# Altium PCB PCB.PcbDoc
Units mm, origin at the board's own origin, x right, y up, seen from the top; angles counter-clockwise.
Board outline 122.4 x 101.6 mm, 4 copper layers (Top Layer, Int1 (GND), Int 2 (PWR), Bottom Layer), stack 1.626 mm thick; 77 components, 58 nets, 254 pads, 31 vias.
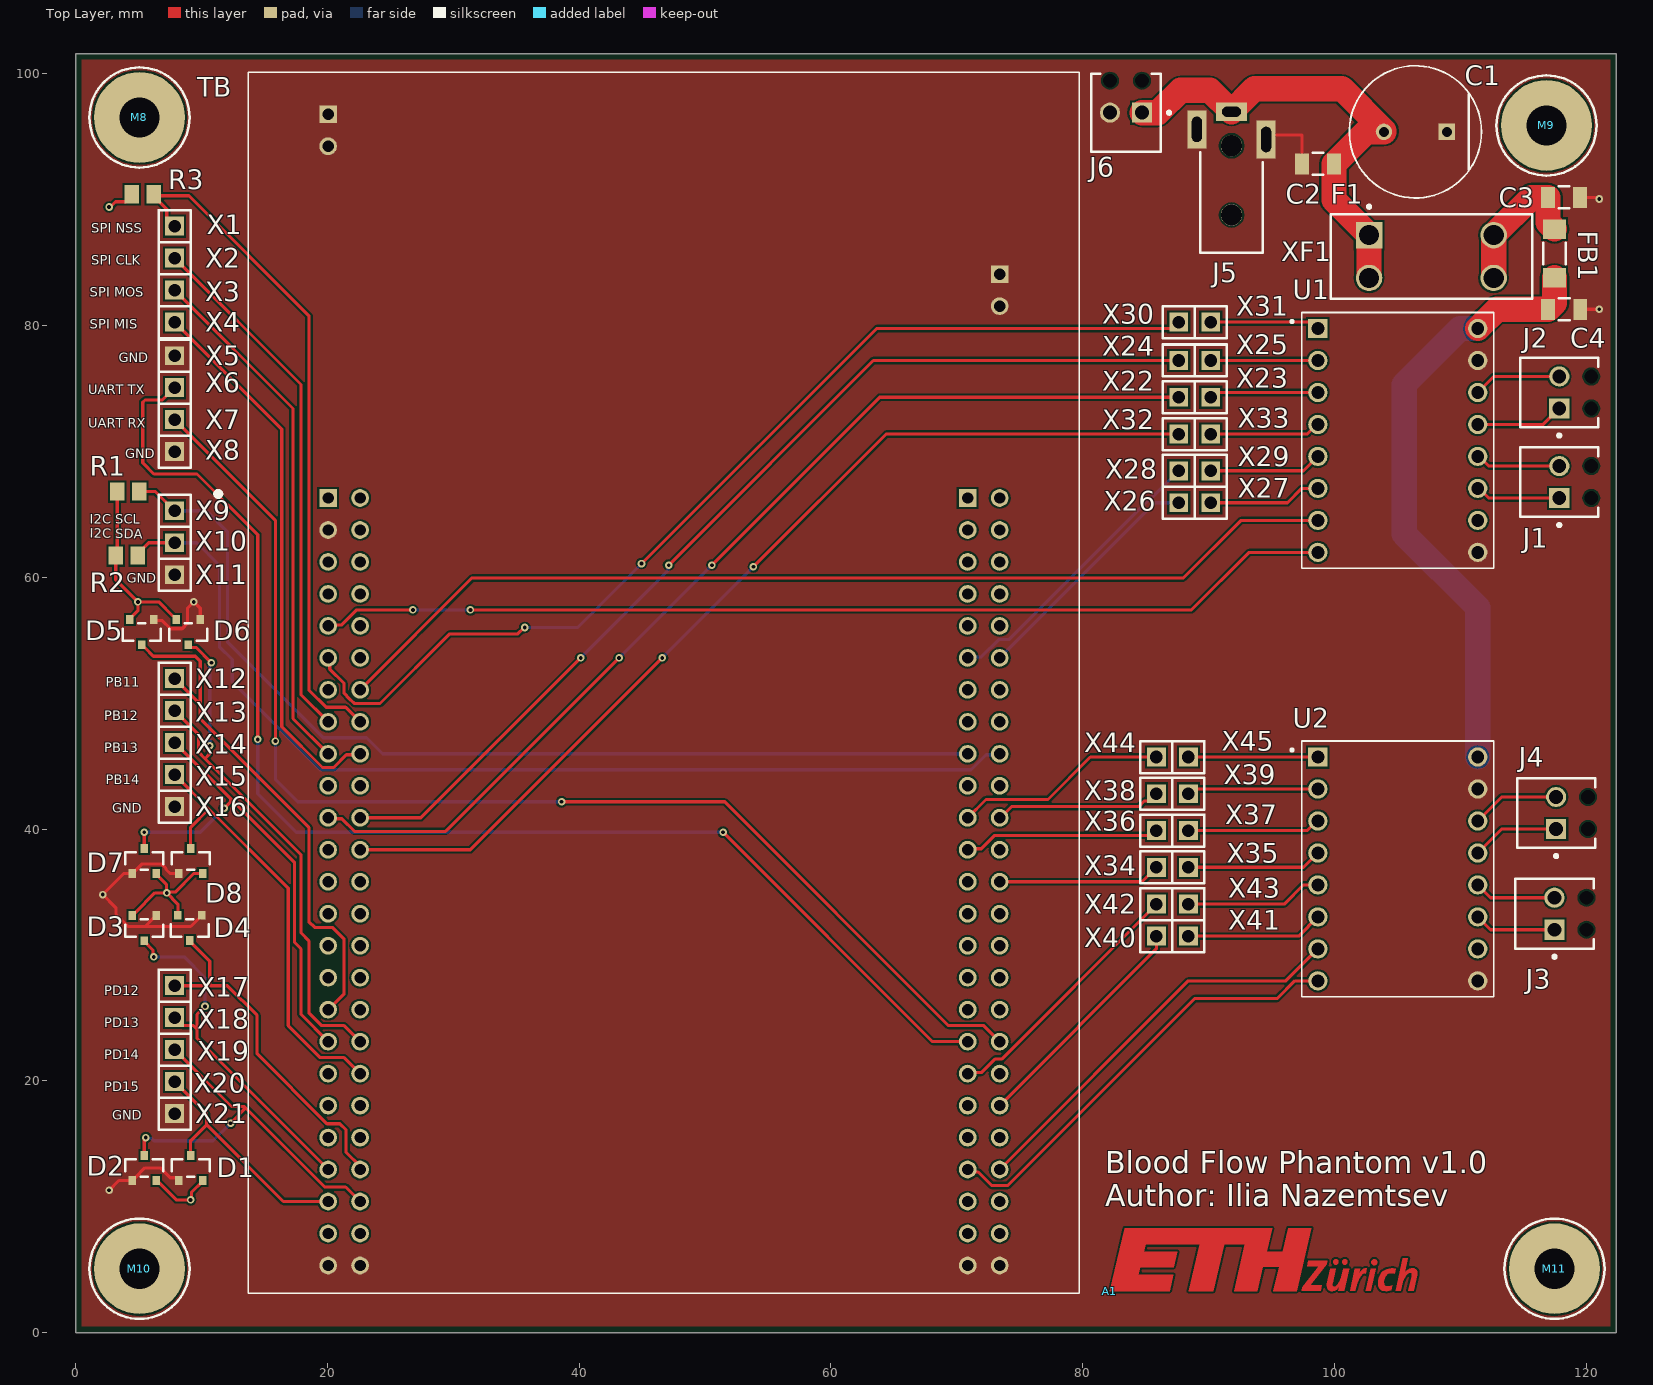
[diagram p0: Top Layer view]
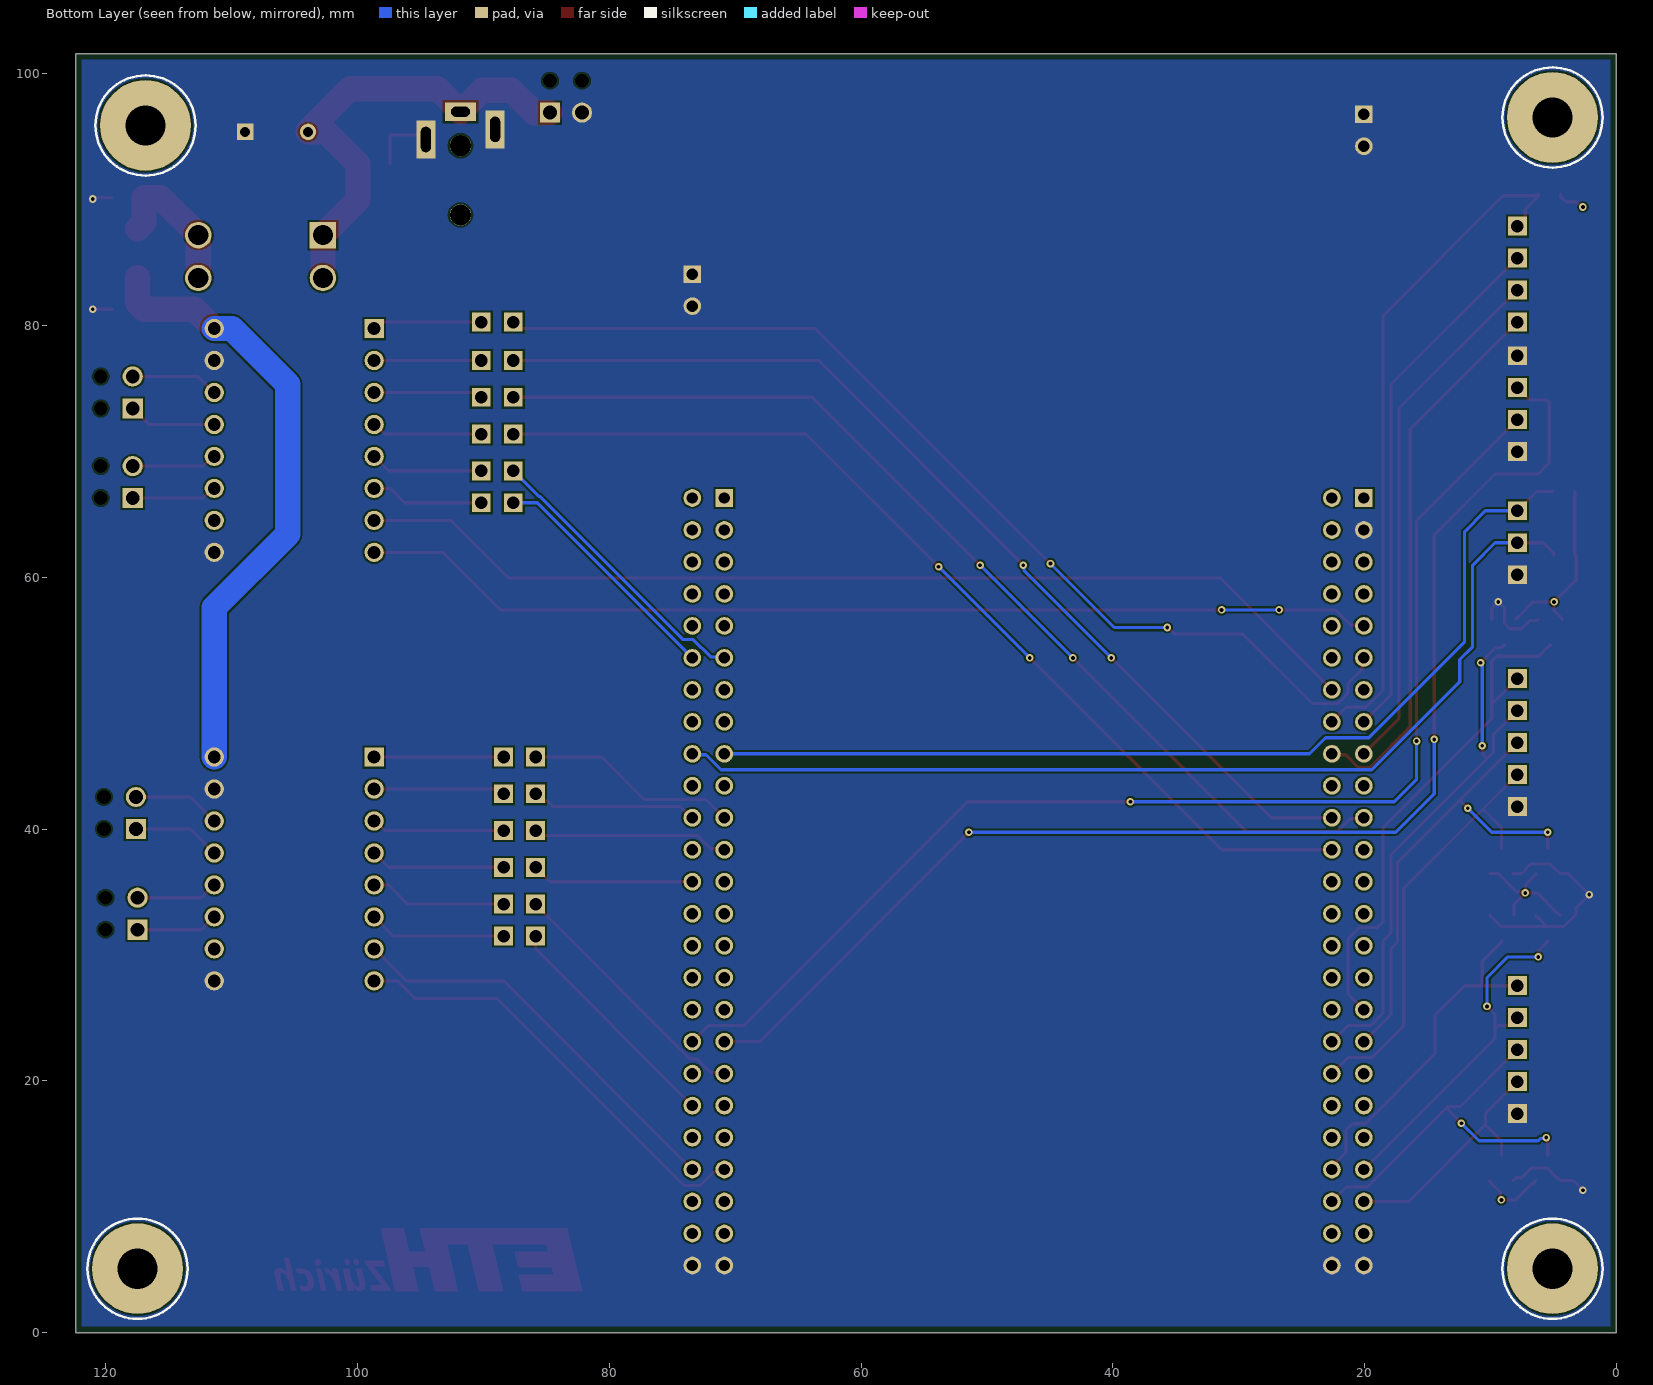
[diagram p1: Bottom Layer view, seen from below]
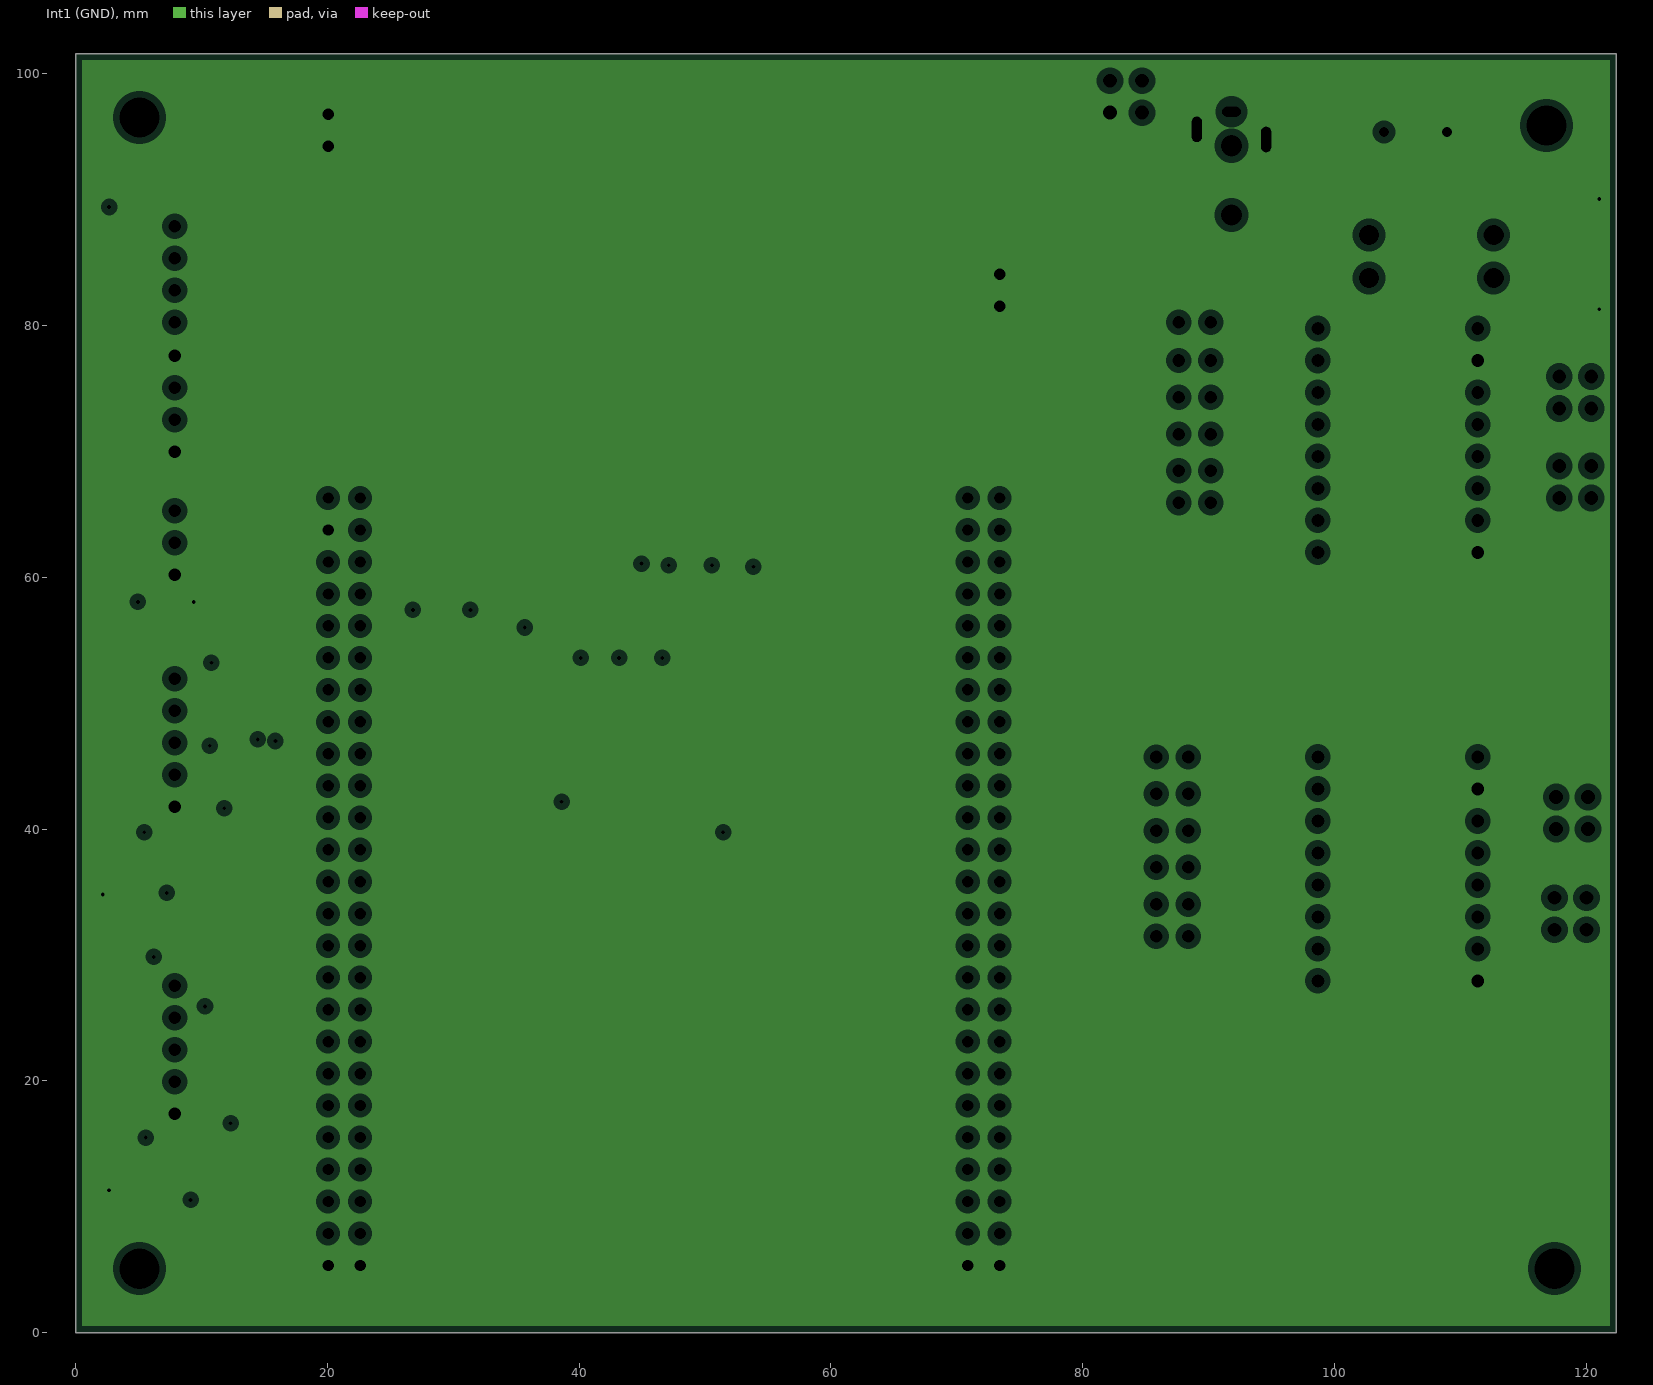
[diagram p2: Int1 (GND), clearances drawn from the general rule]
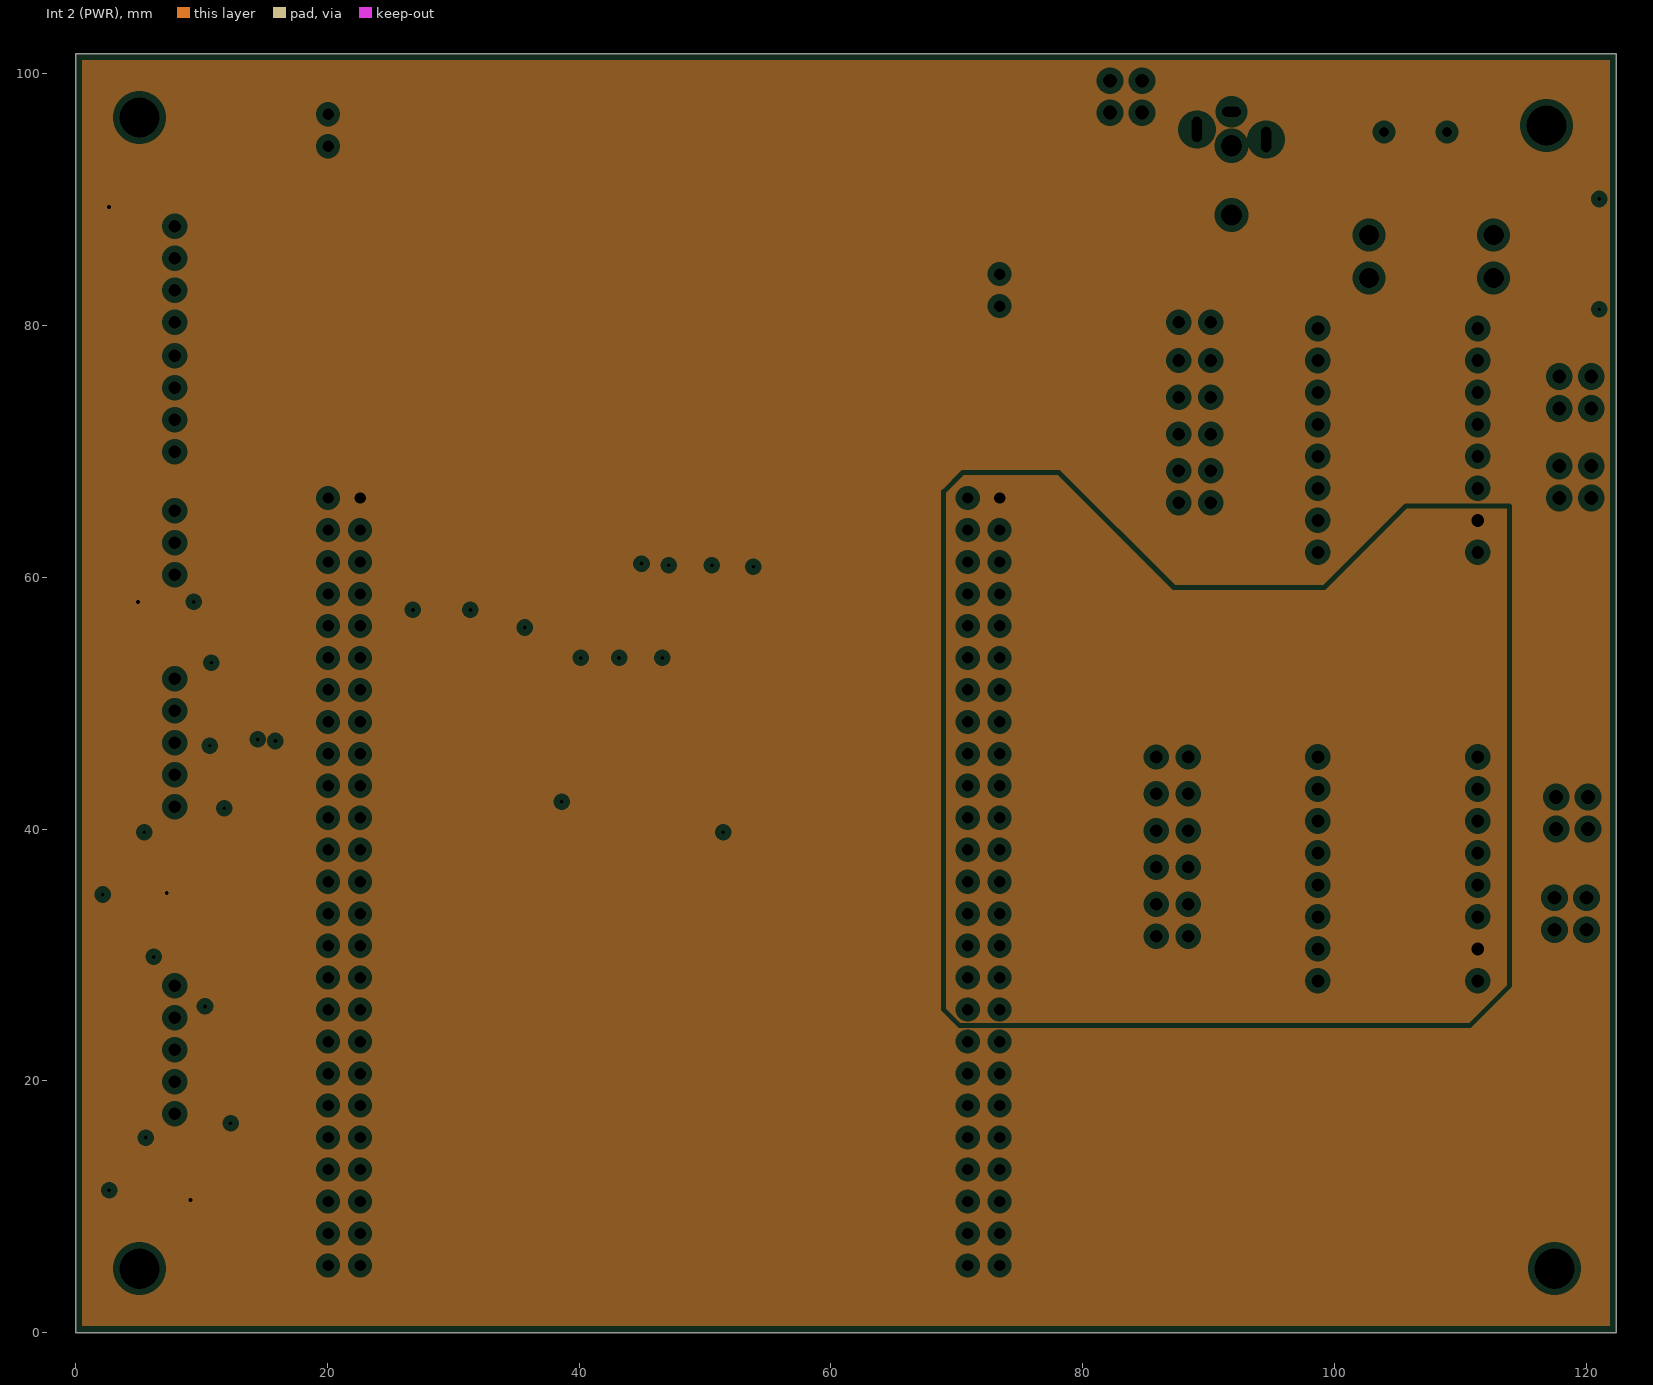
[diagram p3: Int 2 (PWR), clearances drawn from the general rule]
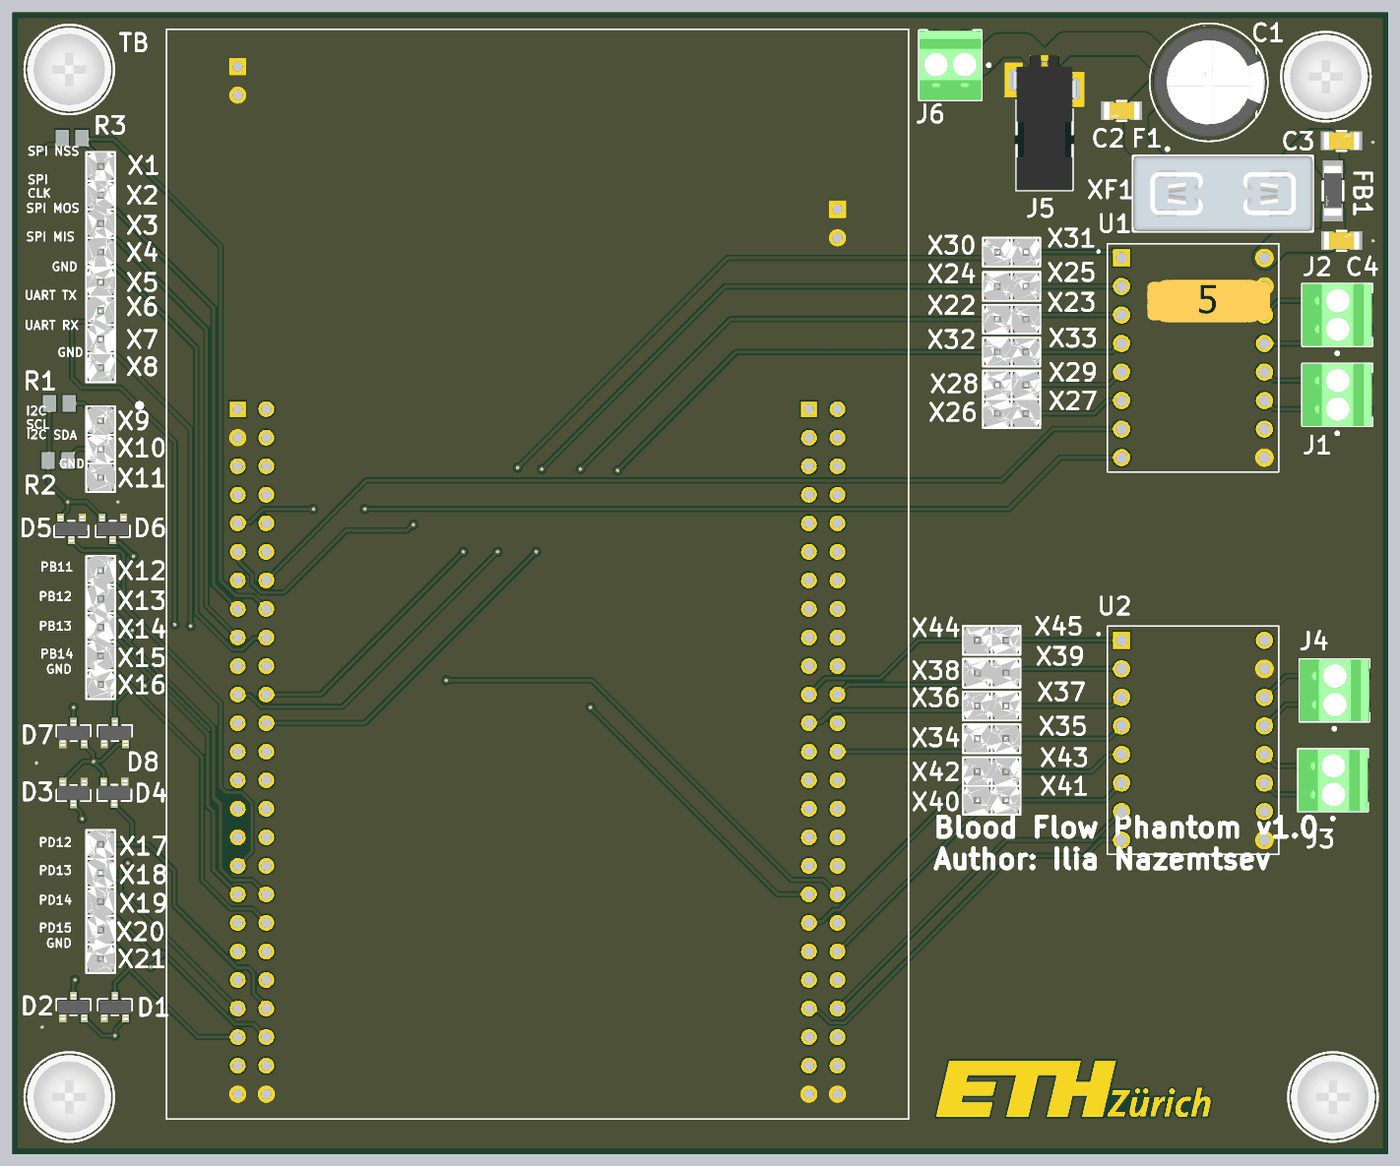
[diagram p4: 3D render of the assembled board from above, using the file's embedded part models]

## Layer stack, top to bottom
Top Solder: solder mask 0.01, SM-001, Dk 4
Top Layer: signal copper 0.035
Dielectric 1: prepreg 0.2104, PP-017, Dk 4
Int1 (GND): plane copper 0.035, net GND
Dielectric 3: core 1.065, Core-039, Dk 4.8
Int 2 (PWR): plane copper 0.035, net (Multiple Nets)
Dielectric 5: prepreg 0.2104, PP-017, Dk 4
Bottom Layer: signal copper 0.035
Bottom Solder: solder mask 0.01, SM-001, Dk 4

## Board outline
0,0 122.4,0 122.4,101.6 0,101.6

## Design rules (kind name [scope] priority, off if disabled: settings)
BoardOutlineClearance [Not OnSilkscreen] p1: gap=0 ignorepadtopadclearanceinfootprint=FALSE except(0.5: Track-OutlineEdge Poly-OutlineEdge)
Clearance Clearance_50_Ohm [InNetClass('50 Ohm')] p1: gap=0.15 ignorepadtopadclearanceinfootprint=FALSE except(0: Arc-Hole Track-Hole SMDPad-Hole THPad-Hole Via-Hole Fill-Hole Poly-Hole Region-Hole Text-Hole; 0.7: Arc-Fill Arc-Poly Arc-Region Track-Fill Track-Poly Track-Region)
Clearance [All] p2: gap=0.15 ignorepadtopadclearanceinfootprint=FALSE except(0: Arc-Hole Track-Hole SMDPad-Hole THPad-Hole Via-Hole Fill-Hole Poly-Hole Region-Hole Text-Hole)
ComponentClearance Clearance_PinHeaders [HasFootprint('68000-101HLF') vs HasFootprint('68000-101HLF')] p1: gap=0 collisioncheckmode=3 verticalgap=0 showdistances=FALSE
ComponentClearance [All] p2: gap=0.254 collisioncheckmode=3 verticalgap=0.254 showdistances=FALSE
Height [All] p1: minheight=0 maxheight=40 prefheight=12.7
HoleSize [All] p1: absolutevalues=TRUE maxlimit=5 minlimit=0.3 maxpercent=80.000 minpercent=20.000
MinimumSolderMaskSliver [All] p1: minsoldermaskwidth=0.1
PlaneClearance [All] p1: clearance=0.508
PlaneConnect [All] p1: pad.planeconnectstyle=Relief pad.reliefexpansion=0.508 pad.reliefentries=4 pad.reliefconductorwidth=0.254 pad.reliefairgap=0.254 via.planeconnectstyle=Direct via.reliefexpansion=0.508 via.reliefentries=4 via.reliefconductorwidth=0.254 via.reliefairgap=0.254
PolygonConnect [All] p1: connectstyle=Direct reliefconductorwidth=0.254 reliefentries=4 polygonreliefangle="90 Angle" airgapwidth=0.254
RoutingVias [All] p1: holewidth=0.3 width=0.62 viastyle="Through Hole" minholewidth=0.3 minwidth=0.62 maxholewidth=0.3 maxwidth=0.62
SilkToSilkClearance [All] p1: silktosilkclearance=0.01
SilkToSolderMaskClearance [IsPad] p1: minsilkscreentomaskgap=0.01 clearancetoexposedcopper=TRUE
SolderMaskExpansion SolderMaskExpansion_1 [IsVia] p1: expansion=0.102 istentingtop=TRUE
SolderMaskExpansion [All] p2: expansion=0.05 istentingtop=FALSE
Width Width_50_Ohm [InNetClass('50 Ohm')] p1: maxlimit=0.35 minlimit=0.25 preferedwidth=0.35 minimp=50.000000 maximp=50.000000 favimp=50.000000
Width [All] p2: maxlimit=2.5 minlimit=0.24 preferedwidth=0.45 minimp=50.000000 maximp=50.000000 favimp=50.000000
22 further rules are at their usual default settings.

## Classes and differential pairs
component class Mechanical: A1 A2 M6 M7 M8 M9 M10 M11
component class Driver: C1 C2 C3 C4 F1 FB1 J1 J2 J3 J4 J5 J6 U1 U2 X22 X23 X24 X25 X26 X27 X28 X29 X30 X31 X32 X33 X34 X35 X36 X37 X38 X39 X40 X41 X42 X43 X44 X45 XF1
component class "Discovery Board": D1 D2 D3 D4 D5 D6 D7 D8 R1 R2 R3 TB X1 X2 X3 X4 X5 X6 X7 X8 X9 X10 X11 X12 X13 X14 X15 X16 X17 X18 X19 X20 X21

## Components (designator, comment, footprint, x,y, rotation, side; value= is the part's Value field where it differs from the comment)
A1 "Logo ETH Zurich" eth-zurich_5mm 82.169,3.302 r0 top
C1 "330uF" FP-RAD-TH-D_10_0_5-L_12_5-MFG 106.426,95.377 r180 top
C2 "100nF" FP-CL31-IPC_C 98.685,92.837 r180 top
C3 "100nF" FP-CL31-IPC_C 118.237,90.17 r0 top
C4 "100nF" FP-CL31-IPC_C 118.243,81.28 r0 top
D1 "BAV99,215" FP-SOT23-MFG 9.144,13.081 r90 top
D2 "BAV99,215" FP-SOT23-MFG 5.461,13.081 r90 top
D3 "BAV99,215" FP-SOT23-MFG 5.461,32.131 r270 top
D4 "BAV99,215" FP-SOT23-MFG 9.083,32.147 r270 top
D5 "BAV99,215" FP-SOT23-MFG 5.268,55.642 r270 top
D6 "BAV99,215" FP-SOT23-MFG 8.956,55.642 r270 top
D7 "BAV99,215" FP-SOT23-MFG 5.461,37.465 r90 top
D8 "BAV99,215" FP-SOT23-MFG 9.144,37.465 r90 top
F1 "0297005.WXNV" FP-0297-MFG 107.696,86.614 r0 top value=17.75mΩ
FB1 "BLM41PG600SN1L" FP-BLM41-0_2-IPC_B 117.475,85.725 r270 top
J1 "1725656" PHOE-1725656-2 117.856,67.564 r90 top
J2 "1725656" PHOE-1725656-2 117.856,74.676 r90 top
J3 "1725656" PHOE-1725656-2 117.475,33.274 r90 top
J4 "1725656" PHOE-1725656-2 117.602,41.275 r90 top
J5 "694101308002" 694101308002 91.821,91.273 r0 top
J6 "1725656" PHOE-1725656-2 83.439,96.901 r180 top
M8 "Mounting Hole with screw and spacer" "Hole M3 with screw" 5.08,96.52 r0 top
M9 "Mounting Hole with screw and spacer" "Hole M3 with screw" 116.84,95.885 r0 top
M10 "Mounting Hole with screw and spacer" "Hole M3 with screw" 5.08,5.08 r0 top
M11 "Mounting Hole with screw and spacer" "Hole M3 with screw" 117.475,5.08 r0 top
R1 "ERJ-6ENF4701V" RESC2013X70X40NL20T20 4.191,66.802 r0 top
R2 "ERJ-6ENF4701V" RESC2013X70X40NL20T20 4.078,61.722 r0 top
R3 "ERJ-6ENF4701V" RESC2013X70X40NL20T20 5.334,90.424 r0 top
TB "STM32F3DISCOVERY" SHIELD_STM32F3DISCOVERY 46.736,51.614 r0 top locked
U1 "A4988_STEPPER_MOTOR_DRIVER_CARRIER" MODULE_A4988_STEPPER_MOTOR_DRIVER_CARRIER 105.029,70.866 r0 top
U2 "A4988_STEPPER_MOTOR_DRIVER_CARRIER" MODULE_A4988_STEPPER_MOTOR_DRIVER_CARRIER 105.029,36.83 r0 top
X1 "SPI1_NSS" 68000-101HLF 7.874,87.884 r90 top value=1000Meg
X2 "SPI1_SCK" 68000-101HLF 7.874,85.344 r90 top value=1000Meg
X3 "SPI1_MOSI" 68000-101HLF 7.874,82.804 r90 top value=1000Meg
X4 "SPI1_MISO" 68000-101HLF 7.874,80.264 r90 top value=1000Meg
X5 "GND" 68000-101HLF 7.874,77.597 r0 top value=1000Meg
X6 "UART4_TX" 68000-101HLF 7.874,75.057 r90 top value=1000Meg
X7 "UART4_RX" 68000-101HLF 7.874,72.517 r90 top value=1000Meg
X8 "GND" 68000-101HLF 7.874,69.977 r0 top value=1000Meg
X9 "I2C1_SCL" 68000-101HLF 7.874,65.278 r90 top value=1000Meg
X10 "I2C1_SDA" 68000-101HLF 7.874,62.738 r90 top value=1000Meg
X11 "GND" 68000-101HLF 7.874,60.198 r0 top value=1000Meg
X12 "PB11" 68000-101HLF 7.874,51.943 r90 top value=1000Meg
X13 "PB12" 68000-101HLF 7.874,49.403 r90 top value=1000Meg
X14 "PB13" 68000-101HLF 7.874,46.863 r90 top value=1000Meg
X15 "PB14" 68000-101HLF 7.874,44.323 r90 top value=1000Meg
X16 "GND" 68000-101HLF 7.874,41.783 r0 top value=1000Meg
X17 "PD12" 68000-101HLF 7.874,27.559 r90 top value=1000Meg
X18 "PD13" 68000-101HLF 7.874,25.019 r90 top value=1000Meg
X19 "PB13" 68000-101HLF 7.874,22.479 r90 top value=1000Meg
X20 "PB14" 68000-101HLF 7.874,19.939 r90 top value=1000Meg
X21 "GND" 68000-101HLF 7.874,17.399 r0 top value=1000Meg
X22 "PH3" 68000-101HLF 87.63,74.295 r0 top value=1000Meg
X23 "PH4" 68000-101HLF 90.17,74.295 r0 top value=1000Meg
X24 "PH5" 68000-101HLF 87.63,77.216 r0 top value=1000Meg
X25 "PH6" 68000-101HLF 90.17,77.216 r0 top value=1000Meg
X26 "PH7" 68000-101HLF 87.63,65.913 r0 top value=1000Meg
X27 "PH8" 68000-101HLF 90.17,65.913 r0 top value=1000Meg
X28 "PH9" 68000-101HLF 87.63,68.453 r0 top value=1000Meg
X29 "PH10" 68000-101HLF 90.17,68.453 r0 top value=1000Meg
X30 "PH11" 68000-101HLF 87.63,80.264 r0 top value=1000Meg
X31 "PH12" 68000-101HLF 90.17,80.264 r0 top value=1000Meg
X32 "PH1" 68000-101HLF 87.63,71.374 r0 top value=1000Meg
X33 "PH2" 68000-101HLF 90.17,71.374 r0 top value=1000Meg
X34 "PH13" 68000-101HLF 85.852,36.957 r0 top value=1000Meg
X35 "PH14" 68000-101HLF 88.392,36.957 r0 top value=1000Meg
X36 "PH15" 68000-101HLF 85.852,39.878 r0 top value=1000Meg
X37 "PH16" 68000-101HLF 88.392,39.878 r0 top value=1000Meg
X38 "PH17" 68000-101HLF 85.852,42.799 r0 top value=1000Meg
X39 "PH18" 68000-101HLF 88.392,42.799 r0 top value=1000Meg
X40 "PH19" 68000-101HLF 85.852,31.496 r0 top value=1000Meg
X41 "PH20" 68000-101HLF 88.392,31.496 r0 top value=1000Meg
X42 "PH21" 68000-101HLF 85.852,34.036 r0 top value=1000Meg
X43 "PH22" 68000-101HLF 88.392,34.036 r0 top value=1000Meg
X44 "PH23" 68000-101HLF 85.852,45.72 r0 top value=1000Meg
X45 "PH24" 68000-101HLF 88.392,45.72 r0 top value=1000Meg
XF1 "3568" KSTN-3568_V 107.696,85.471 r0 top

## Footprints (in the part's own frame and the unit in brackets; to place one, negate y for a bottom-side part, rotate by r counter-clockwise, add the part's x,y. Pads: shape width x height; smd on the part's side, far side on the other; paste and mask are expansions set on the pad)
68000-101HLF [mm] "Terminal Assembly, 1 Pin, Vertical, 2.54mm Pitch, Male"
  rect 1.5x1.5 hole 1: 1(0,0)
  silkscreen extent -1.27,-1.27 1.27,1.27, body extent -1.27,-1.21 1.27,1.21, height 8.39
694101308002 [mm] "DC Power Jack THT Right Angled Low Profile(2.8)"
  rect 2.5x1.5 hole 0.8 slot 1.5 at 0 deg: 1(0,5.7)
  rect 1.5x3 hole 0.8 slot 2 at 90 deg: 2(2.75,3.5) 3(-2.75,4.3)
  round 1.7 hole 1.7 unplated: MH1(0,-2.5) MH2(0,3)
  silkscreen extent -2.5,-5.5 2.5,2.5, body extent -2.9,-5.5 2.9,6.5, height 5.05
eth-zurich_5mm [mm] "Logo ETH Zurich"
  Top Layer circle w0.5: c20.997,2.288 r0.001
  Top Layer circle w0.45: c18.655,2.315 r0.001
  Top Layer circle w0.45: c17.94,2.315 r0.001
  Top Layer region: 23.53,1.6 23.53,1.6 23.415,1.465 23.667,2.602 23.257,2.602 22.69,0.04 23.1,0.04 23.25,0.723 23.335,0.925 23.435,1.105 23.535,1.265 23.635,1.37 23.715,1.425 23.795,1.465 23.855,1.465 23.915,1.445 23.955,1.405 23.965,1.345 23.965,1.265 23.955,1.195 23.697,0.04 24.142,0.04 24.335,0.925 24.408,1.255 24.415,1.405 24.395,1.545 24.355,1.665 24.275,1.745 24.175,1.805 24.095,1.825 23.935,1.825 23.775,1.785 23.635,1.705
  Top Layer region: 22.69,1.753 22.69,1.753 22.6,1.785 22.5,1.8 22.34,1.8 22.16,1.785 21.97,1.74 21.81,1.66 21.68,1.56 21.6,1.48 21.52,1.38 21.45,1.26 21.4,1.14 21.35,1 21.32,0.87 21.3,0.74 21.3,0.57 21.32,0.42 21.35,0.32 21.4,0.22 21.46,0.14 21.54,0.08 21.63,0.04 21.72,0.02 21.92,0 22.02,0 22.2,0.02 22.313,0.048 22.36,0.06 22.403,0.453 22.31,0.42 22.18,0.39 22.08,0.38 22.01,0.38 21.93,0.4 21.86,0.44 21.82,0.48 21.79,0.54 21.77,0.61 21.76,0.68 21.76,0.77 21.78,0.9 21.82,1.03 21.87,1.14 21.93,1.23 22.02,1.34 22.1,1.39 22.18,1.42 22.26,1.43 22.38,1.43 22.49,1.42 22.54,1.41 22.61,1.39
  Top Layer region: 20.73,0.04 20.73,0.04 21.117,1.785 20.707,1.785 20.32,0.04
  Top Layer region: 19.763,1.3 19.763,1.3 19.87,1.785 19.46,1.785 19.072,0.04 19.483,0.04 19.545,0.323 19.64,0.63 19.75,0.9 19.84,1.07 19.965,1.235 20.05,1.32 20.12,1.37 20.19,1.4 20.24,1.4 20.308,1.382 20.4,1.8 20.34,1.81 20.28,1.81 20.22,1.8 20.13,1.76 20.07,1.72 19.99,1.65 19.92,1.58 19.84,1.46
  Top Layer region: 18.61,0.04 18.61,0.04 18.998,1.785 18.535,1.785 18.385,1.102 18.3,0.9 18.2,0.72 18.1,0.56 18,0.455 17.92,0.4 17.84,0.36 17.78,0.36 17.72,0.38 17.68,0.42 17.67,0.48 17.67,0.56 17.68,0.63 17.938,1.785 17.492,1.785 17.3,0.9 17.227,0.57 17.22,0.42 17.24,0.28 17.28,0.16 17.36,0.08 17.46,0.02 17.54,0 17.7,0 17.86,0.04 18,0.12 18.105,0.225 18.22,0.36 18.15,0.04
  Top Layer region: 17.265,2.4 17.265,2.4 15.753,2.4 15.66,1.985 16.575,1.985 15.288,0.308 15.23,0.04 16.74,0.04 16.833,0.455 15.915,0.455 17.207,2.14
  Top Layer region: 14.825,0 14.825,0 16,5 14.155,5 13.712,3.117 12.432,3.117 12.872,5 1.175,5 0,0 1.953,0 4.73,0 5.035,1.3 2.26,1.3 2.402,1.91 5.058,1.91 5.34,3.11 2.682,3.11 2.822,3.7 7.123,3.7 6.25,0 8.205,0 9.075,3.7 10.723,3.7 9.855,0 11.7,0 12.15,1.917 13.43,1.917 12.98,0
FP-0297-MFG [mm]
  body extent -5.55,-2 5.55,2, height 0.25
FP-BLM41-0_2-IPC_B [mm]
  rect 1.554x1.806 smd paste+0 mask+0: 1(-1.926,0) 2(1.926,0)
  silkscreen extent -0.85,-0.9 0.85,0.9, body extent -2.95,-1.15 2.95,1.15, height 0.25
FP-CL31-IPC_C [mm]
  rect 1.105x1.658 smd paste+0 mask+0: 1(-1.276,0) 2(1.276,0)
  silkscreen extent -0.42,-0.87 0.42,0.87, body extent -1.93,-0.97 1.93,0.97, height 0.25
FP-RAD-TH-D_10_0_5-L_12_5-MFG [mm]
  rect 1.3x1.3 hole 0.8 paste-2539.97 mask+0: 1(-2.5,0)
  round 1.3 hole 0.8 paste-2539.97 mask+0: 2(2.5,0)
  silkscreen extent -5.25,-5.25 5.25,5.25, body extent -5.35,-5.35 5.35,5.35, height 0.25
FP-SOT23-MFG [mm]
  rect 0.7x0.6 smd paste-1000 mask+0: 1(-1,0.95) 2(-1,-0.95) 3(1,0)
  silkscreen extent -0.7,-1.5 0.7,1.5, body extent -1.5,-1.65 1.5,1.65, height 0.25
"Hole M3 with screw" [mm] "Plated Thru-Hole, 3.2mm hole, 7.2mm pad"
  round 7.2 hole 3.2: 1(0,0)
  silkscreen extent -3.98,-3.98 3.98,3.98, body extent -3.75,-3.75 3.75,3.75, height 35
KSTN-3568_V [mm] "THD, 4-Leads, Body 16x6.73mm, Pitch 9.9mm"
  rect 2.1x2.1 hole 1.6: 1(-4.95,1.7)
  round 2.1 hole 1.6: 2(-4.95,-1.7) 3(4.95,1.7) 4(4.95,-1.7)
  silkscreen extent -8,-3.36 8,4.09, body extent -8,-3.37 8,3.37, height 7.44
MODULE_A4988_STEPPER_MOTOR_DRIVER_CARRIER [mm]
  rect 1.53x1.53 hole 1.02: 1(-6.35,8.89)
  round 1.53 hole 1.02: 2(-6.35,6.35) 3(-6.35,3.81) 4(-6.35,1.27) 5(-6.35,-1.27) 6(-6.35,-3.81) 7(-6.35,-6.35) 8(-6.35,-8.89) 9(6.35,-8.89) 10(6.35,-6.35) 11(6.35,-3.81) 12(6.35,-1.27) 13(6.35,1.27) 14(6.35,3.81) 15(6.35,6.35) 16(6.35,8.89)
  silkscreen extent -8.5,-10.16 7.62,10.16
PHOE-1725656-2 [mm] "Connector, 2-Leads, Body 6.2x5.4mm, Pitch 2.54mm"
  rect 1.6x1.6 hole 1.1: 1(-1.27,0)
  round 1.6 hole 1.1: 2(1.27,0)
  round 0 hole 1.1 unplated: MH1(-1.27,-2.54) MH2(1.27,-2.54)
  silkscreen extent -3.54,-3.1 2.77,3.1, body extent -2.77,-3.1 2.77,3.1, height 9
RESC2013X70X40NL20T20 [mm] "Chip Resistor, 2-Leads, Body 2.2x1.35mm, IPC Medium Density"
  rect 1.15x1.45 smd: 1(-0.875,0) 2(0.875,0)
  body extent -1.1,-0.72 1.1,0.72, height 0.7
SHIELD_STM32F3DISCOVERY [mm]
  rect 1.408x1.408 hole 0.9: 1(-26.67,14.68) 51(24.13,14.68) 101(-26.67,45.16) 103(26.67,32.46)
  round 1.408 hole 0.9: 2(-24.13,14.68) 3(-26.67,12.14) 4(-24.13,12.14) 5(-26.67,9.6) 6(-24.13,9.6) 7(-26.67,7.06) 8(-24.13,7.06) 9(-26.67,4.52) 10(-24.13,4.52) 11(-26.67,1.98) 12(-24.13,1.98) 13(-26.67,-0.56) 14(-24.13,-0.56) 15(-26.67,-3.1) 16(-24.13,-3.1) 17(-26.67,-5.64) 18(-24.13,-5.64) 19(-26.67,-8.18) 20(-24.13,-8.18) 21(-26.67,-10.72) 22(-24.13,-10.72) 23(-26.67,-13.26) 24(-24.13,-13.26) 25(-26.67,-15.8) 26(-24.13,-15.8) 27(-26.67,-18.34) 28(-24.13,-18.34) 29(-26.67,-20.88) 30(-24.13,-20.88) 31(-26.67,-23.42) 32(-24.13,-23.42) 33(-26.67,-25.96) 34(-24.13,-25.96) 35(-26.67,-28.5) 36(-24.13,-28.5) 37(-26.67,-31.04) 38(-24.13,-31.04) 39(-26.67,-33.58) 40(-24.13,-33.58) 41(-26.67,-36.12) 42(-24.13,-36.12) 43(-26.67,-38.66) 44(-24.13,-38.66) 45(-26.67,-41.2) 46(-24.13,-41.2) 47(-26.67,-43.74) 48(-24.13,-43.74) 49(-26.67,-46.28) 50(-24.13,-46.28) 52(26.67,14.68) 53(24.13,12.14) 54(26.67,12.14) 55(24.13,9.6) 56(26.67,9.6) 57(24.13,7.06) 58(26.67,7.06) 59(24.13,4.52) 60(26.67,4.52) 61(24.13,1.98) 62(26.67,1.98) 63(24.13,-0.56) 64(26.67,-0.56) 65(24.13,-3.1) 66(26.67,-3.1) 67(24.13,-5.64) 68(26.67,-5.64) 69(24.13,-8.18) 70(26.67,-8.18) 71(24.13,-10.72) 72(26.67,-10.72) 73(24.13,-13.26) 74(26.67,-13.26) 75(24.13,-15.8) 76(26.67,-15.8) 77(24.13,-18.34) 78(26.67,-18.34) 79(24.13,-20.88) 80(26.67,-20.88) 81(24.13,-23.42) 82(26.67,-23.42) 83(24.13,-25.96) 84(26.67,-25.96) 85(24.13,-28.5) 86(26.67,-28.5) 87(24.13,-31.04) 88(26.67,-31.04) 89(24.13,-33.58) 90(26.67,-33.58) 91(24.13,-36.12) 92(26.67,-36.12) 93(24.13,-38.66) 94(26.67,-38.66) 95(24.13,-41.2) 96(26.67,-41.2) 97(24.13,-43.74) 98(26.67,-43.74) 99(24.13,-46.28) 100(26.67,-46.28) 102(-26.67,42.62) 104(26.67,29.92)
  silkscreen extent -35.6,-48.5 33,48.5

## Part data
A1: library part CMP-00038-1
C1: library part CMP-05427-001459-1, "Aluminum Electrolytic Capacitors (Radial Lead Type) 330uF ±20% 35V", Case/Package=Radial, Max Operating Temperature=105°C, Min Operating Temperature=-40°C, Ripple Current=1.33A, Tolerance=20%, Voltage=35V, Capacitance=330uF, Construction=RADIAL, Diameter=10mm, Height=12.5mm, Impedance=43mR, Lead Diameter=0.6mm, Lead Pitch=5mm, Life (Hours)=6000Hour, Packaging=Bulk, REACH SVHC="No SVHC", Ripple Current (AC)=1.33A, RoHS Compliant=Yes, Series="FR Radial", Termination=Radial, Voltage Rating=35V
C2 C3 C4: library part CMP-13271-001731-1, "Cap Ceramic 100nF 50V X7R ±10% SMD 1206 +125°C Embossed T/R", Case/Package=1206, Dielectric=X7R, Max Operating Temperature=125°C, Min Operating Temperature=-55°C, Package Quantity=15000, Tolerance=10%, Voltage=50V, Capacitance=100nF, Depth=1.6mm, Height=0.85mm, Lead Free="Lead Free", Length=3.2mm, Mount="Surface Mount", Packaging="Tape and Reel", Radiation Hardening=No, Thickness=0.037inch, Voltage Rating=50V, Voltage Rating (DC)=50V, Width=0.063inch
D1 D2 D3 D4 D5 D6 D7 D8: library part CMP-14399-000006-1, "DIODE ARRAY GP 100V 215MA SOT23"
F1: library part CMP-08605-000073-1, "FUSE AUTO 5A 32VDC BLADE MINI", Fuse Current=5A, Fuse Interrupt Dc Current=1000A, Fuse Voltage Drop=129mV, Manufacturer="Littelfuse Inc", Max Fuse Dc Voltage=32V, Package=0297, Resistance=17.75mΩ, Temperature="-40°C to +125°C", Temperature Range High=+125°C, Temperature Range Low=-40°C, Automotive=Yes, Category=Fuse, ComponentLink2Description=Datasheet, ComponentLink2URL=https://www.littelfuse.com/~/media/automotive/datasheets/fuses/passenger-car-and-commercial-vehicle/blade-fuses/littelfuse_mini_datasheet.pdf, Device Class L1="Circuit Protection", Device Class L2=Fuses, Device Class L3=unset, Digikey Description="FUSE AUTO 5A 32VDC BLADE MINI", Fuse Blow Speed=Fast, Fuse I2T=25A2Sec, Lead Free=Yes, Manufacturer Part Number=0297005.WXNV, Mouser Description="Automotive Fuses 32V 5A Mini", Octopart=https://octopart.com/0297005.wxnv-littelfuse-566870, RoHS=TRUE, Voltage Rating=32V
FB1: library part CMP-0686-00754-3, "Ferrite Bead, 1806, 60Ω @ 100MHz, 0.009Ω, 6A", Case Code (Imperial)=1806, Case Code (Metric)=4516, Current=6A, DC Resistance (DCR)=9mR, Frequency=100MHz, Inductor Type="FERRITE BEAD", Manufacturer Series=BLM41P, Max Operating Temperature=125°C, Min Operating Temperature=-55°C, Package Quantity=1, Tolerance=25%, Case/Package=1806, Contact Plating=Tin, Core Material=Ferrite, Current Rating=6A, DC Current=6A, DC Resistance-Max=9mR, Depth=1.6mm, Height=1.6mm, Impedance=60R, Lead Free="Lead Free", Length=4.5mm, Material=Ferrite, Max Current Rating=6A, Max DC Current=6A, Military Standard=Not, Number of Circuits=1, Number of Functions=1, Number of Lines=1, Number of Pins=2, Packaging="Tape and Reel", Radiation Hardening=No, REACH SVHC="No SVHC", RoHS Compliant=Yes, Series=BLM41P, Shielding=Unshielded, Terminal Finish=Tin, Termination=SMD/SMT, Test Frequency=100MHz, Width=1.6mm
J1 J2 J3 J4 J6: library part CMP-2000-05299-1, "Male Header, Pitch 2.54 mm, 1 x 2 Position, Height 9 mm, Tail Length 3.5 mm", Colour=Green, Manufacturer="Phoenix Contact", Content=250pc(s), Datasheet URL=http://datasheet.octopart.com/1725656-Phoenix-Contact-datasheet-5302866.pdf, Datasheet Version=Apr-08, Industrial packaging=Yes, Manufacturer part No.=1725656, Manufacturer URL=http://www.phoenixcontact.com/, Number of Contacts=2, Pitch=2.54mm, Type=MPT0,5/2-2,54
J5: library part CMP-1502-00182-1, "DC Power Jack Connector Low Profile WR-DC, Male, Right Angled, THT, 2 A, 12 V", Manufacturer="Wurth Elektronik", Operating Temperature=-40to85degC, Rated Current=2A, Working Voltage=12V, Datasheet URL=http://katalog.we-online.de/em/datasheet/694101308002.pdf, Gender=Male, Manufacturer URL=http://www.we-online.de, Mounting Technology=THT, Opening Diameter=2.8mm, Orientation=RightAngled, Package Reference=694101308002, Packaging=Bag, Part Number=694101308002, Plug Inner Diameter=0.75mm, Plug Outer Diameter=2.35mm, Publisher=WurthElektronik
M8 M9 M10 M11: library part CMP-00214-1, "Mounting Hole, 7.2mm pad, 3.2mm plated hole", ClassName="Mounting Hole"
R1 R2 R3: library part CMP-2001-00550-5, "Chip Resistor, 4.7 KOhm, +/- 1%, 0.125 W, -55 to 155 degC, 0805 (2012 Metric), RoHS, Tape and Reel", Manufacturer=Panasonic, Max Operating Temperature="155 degC", Min Operating Temperature="-55 degC", Package Quantity=5000, Voltage Rating="150 V", ComponentLink1Description="Manufacturer URL", ComponentLink1URL=http://www.panasonic.com/, ComponentLink2Description=Datasheet, ComponentLink2URL=http://industrial.panasonic.com/cdbs/www-data/pdf/RDA0000/AOA0000C86.pdf, DatasheetVersion=04/2015, Height="0.6 mm", Length="2 mm", Mount="Surface Mount", Mounting Technology="Surface Mount", PackageDescription="2-Pin Surface Mount Device, Body 2 x 1.25 mm", PackageReference=0805, Packaging="Tape and Reel", Pins=2, REACH SVHC=Yes, RoHSCompliant=true
TB: "STM32F303VCT6 Discovery STM32F3 ARMÂ® CortexÂ®-M4 MCU 32-Bit Embedded Evaluation Board", Package="LQFP-100 STMicroelectronics", Availability=Unavailable, MF=STMicroelectronics, MP=STM32F3DISCOVERY, Price=None, SnapEDA_Link=https://www.snapeda.com/parts/STM32F3DISCOVERY/STMicroelectronics/view-part/10815/?ref=snap
U1 U2: "Stepper motor controler; IC: A4988; 1A; Uin mot: 8Ã·35V", Package=None, Availability=Unavailable, MP=A4988_STEPPER_MOTOR_DRIVER_CARRIER, Price=None
X1 X2 X3 X4 X5 X6 X7 X8 X9 X10 X11 X12 X13 X14 X15 X16 X17 X18 X19 X20 X21 X22 X23 X24 X25 X26 X27 X28 X29 X30 X31 X32 X33 X34 X35 X36 X37 X38 X39 X40 X41 X42 X43 X44 X45: library part CMP-00008-5, "1 Positions Header, Unshrouded Connector  Through Hole Gold or Gold, GXT™", Colour=Black, Current Rating=3A, Flammability Rating="UL94 V-0", Insulation Resistance=5GR, Manufacturer="Amphenol FCI", Manufacturer Part Number=68000-101HLF, Max Operating Temperature=125°C, Max Voltage Rating (AC)=1.5kV, Min Operating Temperature=-65°C, Package Quantity=100, Supplier Part Number=609-3460-ND, ComponentLink1Description=68000-274334-5147816.pdf, ComponentLink1URL=https://datasheet.ciiva.com/5147/68000-274334-5147816.pdf, ComponentLink2Description=70236886-14643004.pdf, ComponentLink2URL=https://datasheet.ciiva.com/14643/70236886-14643004.pdf, ComponentLink3Description=68000-10150538.pdf, ComponentLink3URL=https://datasheet.ciiva.com/10150/68000-10150538.pdf, ComponentLink4Description=68000-731073.pdf, ComponentLink4URL=https://datasheet.ciiva.com/731/68000-731073.pdf, Connector Type="Male Pin", Contact Gender=Male, Contact Material=Bronze, Contact Mating Length=0.23inch, Contact Plating=Nickel,Gold,GXT, Depth=2.41mm, Gender=Male, Housing Colour=Black, Housing Material=Thermoplastic, Length=2.54mm, Mating Post Length=5.84mm, Number of Contacts=1, Number of Positions=1, Number of Rows=1, Orientation=Straight, Packaging=Bulk, Pitch=2.54mm, Radiation Hardening=No, Supplier=Digikey, Termination=Solder, Termination Post Length=2.41mm, Voltage Rating=1.5kV, Voltage Rating (DC)=1.5kV
XF1: library part CMP-2000-05464-1, "Fuse Holder, 20 A, 500 V, -50 to 145 degC, 4-Pin THD, RoHS", Manufacturer=Keystone, Package Description="4-Pin Through Hole Device, Body 16 x 6.73 mm, Pitch 9.9 mm", Datasheet URL=https://datasheet.ciiva.com/16294/m60-2p40-16294706.pdf, Datasheet Version=04/2013, Manufacturer URL=http://www.keyelco.com/, Mounting Technology=ThroughHole, Package Reference=3568

## Via types
v1: diameter 0.6, hole 0.3, Top Layer to Bottom Layer, tented both sides, 31 vias

## Nets (pads, with @x,y where several pads share a name; then routed paths per layer and width w, separated by ;. In a path a pad name is that pad's centre, name@x,y a point inside that pad or via, vN(x,y) a via of type N, cw(c..) or ccw(c..) an arc to the next point about the centre after c; other vN are vias at no path point)
3.3V: D1.2 D2.2 D3.2 D4.2 D5.2 D6.2 D7.2 D8.2 R1.1 R2.1 R3.1 TB.2 | length 33.5
  Top Layer w0.254: v1(2.667,89.408) 2.761,89.408 3.179,89.826 4.011,89.826 4.459,90.274 R3.1 ; R1.1 3.316,61.835 R2.1 3.203,59.789 v1(4.953,58.039) ; D5.2 4.318,56.692 4.953,57.327 v1(4.953,58.039) ; D3.2 4.511,33.181 4.684,33.354 4.734,33.354 6.305,34.925 v1(7.239,34.925) ; D2.2 6.461,12.081 6.477,12.065 6.477,11.965 6.584,11.858 6.684,11.858 8.001,10.541 v1(9.144,10.541) 9.21,10.607 9.21,11.147 10.094,12.031 D1.2 ; D7.2 6.411,36.415 7.22,35.606 7.22,34.944 v1(7.239,34.925) ; D6.2 8.006,56.692 7.833,56.865 7.783,56.865 6.609,58.039 v1(4.953,58.039) ; D4.2 8.133,34.031 v1(7.239,34.925) ; D8.2 9.397,36.465 7.92,34.988 7.302,34.988 v1(7.239,34.925)
5V: TB.52 U1.10 U2.10
"D1 1A": J1.2 U1.12 | length 6.8
  Top Layer w0.254: U1.12 111.476,69.596 112.238,68.834 J1.2
"D1 1B": J1.1 U1.11 | length 6.8
  Top Layer w0.254: U1.11 111.476,67.056 112.238,66.294 J1.1
"D1 2A": J2.1 U1.13 | length 7
  Top Layer w0.254: U1.13 116.586,72.136 J2.1
"D1 2B": J2.2 U1.14 | length 7
  Top Layer w0.254: U1.14 112.649,75.946 J2.2
"D1 DIR": TB.9 U1.8 | length 81
  Top Layer w0.254: TB.9 20.145,56.213 21.151,56.213 22.342,57.404 v1(26.797,57.404) ; v1(31.369,57.404) 88.646,57.404 93.218,61.976 U1.8
  Bottom Layer w0.254: v1(26.797,57.404) v1(31.369,57.404)
"D1 ENABLE": TB.11 X30.1 | length 82.5
  Top Layer w0.254: TB.11 20.198,53.462 20.198,52.7 21.336,51.562 21.336,50.774 21.752,50.358 ccw(c22.603,51.031) 21.834,50.265 ccw(c24.522,52.949) 22.097,50.026 22.167,49.969 22.257,49.969 24.188,49.969 29.718,55.499 35.143,55.499 35.651,56.007 v1(35.687,56.007) ; v1(44.958,61.087) 63.627,79.756 87.122,79.756 X30.1
  Bottom Layer w0.254: v1(35.687,56.007) 39.878,56.007 v1(44.958,61.087)
"D1 MS1": TB.22 X24.1 | length 80.3
  Top Layer w0.254: TB.22 27.432,40.894 v1(40.132,53.594) ; v1(47.117,60.96) 63.373,77.216 X24.1
  Bottom Layer w0.254: v1(40.132,53.594) 47.051,60.513 47.051,60.894 v1(47.117,60.96)
"D1 MS2": TB.21 X22.1 | length 82.3
  Top Layer w0.254: TB.21 20.145,40.815 21.151,40.815 22.157,39.809 29.395,39.809 v1(43.18,53.594) ; v1(50.546,60.96) 63.881,74.295 X22.1
  Bottom Layer w0.254: v1(43.18,53.594) v1(50.546,60.96)
"D1 MS3": TB.24 X32.1 | length 78.7
  Top Layer w0.254: TB.24 31.369,38.354 v1(46.609,53.594) ; v1(53.848,60.833) 64.389,71.374 X32.1
  Bottom Layer w0.254: v1(46.609,53.594) v1(53.848,60.833)
"D1 RESET": TB.61 X28.1 | length 23.1
  Bottom Layer w0.254: TB.61 70.945,53.673 71.951,53.673 73.327,55.049 74.143,55.049 85.515,66.421 85.598,66.421 X28.1 X28.1@87.503,68.58
"D1 SLEEP": TB.62 X26.1 | length 19.3
  Bottom Layer w0.254: TB.62 85.725,65.913 X26.1
"D1 STEP": TB.14 U1.7 | length 81.9
  Top Layer w0.254: TB.14@22.606,51.308 TB.14 31.496,59.944 88.011,59.944 92.583,64.516 U1.7
"D2 1A": J3.2 U2.12 | length 6.5
  Top Layer w0.254: U2.12 112.395,34.544 J3.2
"D2 1B": J3.1 U2.11 | length 6.5
  Top Layer w0.254: U2.11 112.395,32.004 J3.1
"D2 2A": J4.1 U2.13 | length 7
  Top Layer w0.254: U2.13 113.284,40.005 J4.1
"D2 2B": J4.2 U2.14 | length 7
  Top Layer w0.254: U2.14 113.284,42.545 J4.2
"D2 DIR": TB.93 U2.8 | length 35.1
  Top Layer w0.254: TB.93 71.062,12.758 71.697,12.758 72.771,11.684 74.041,11.684 88.9,26.543 95.46,26.543 96.857,27.94 U2.8
"D2 ENABLE": TB.71 X44.1 | length 17
  Top Layer w0.254: TB.71 72.321,42.349 77.246,42.349 80.617,45.72 X44.1
"D2 MS1": TB.72 X38.1 | length 13.2
  Top Layer w0.254: TB.72 73.46,40.894 74.349,41.783 84.455,41.783 84.896,42.224 85.277,42.224 X38.1
"D2 MS2": TB.73 X36.1 | length 15.6
  Top Layer w0.254: TB.73 70.945,38.433 71.951,38.433 73.015,39.497 85.471,39.497 X36.1
"D2 MS3": TB.76 X34.1 | length 12.9
  Top Layer w0.254: TB.76 84.709,35.814 X34.1
"D2 RESET": TB.87 X42.1 | length 20.6
  Top Layer w0.254: TB.87 70.945,20.653 71.951,20.653 73.027,21.73 73.556,21.73 85.229,33.403 85.229,33.413 X42.1
"D2 SLEEP": TB.90 X40.1 | length 18.6
  Top Layer w0.254: TB.90 85.852,30.48 X40.1
"D2 STEP": TB.94 U2.7 | length 32.5
  Top Layer w0.254: TB.94 88.392,27.94 96.139,27.94 U2.7
GND: C1.1 C2.2 C3.2 C4.2 D1.1 D2.1 D3.1 D4.1 D5.1 D6.1 D7.1 D8.1 J5.2 J5.3 J6.2 TB.3 TB.49 TB.50 TB.99 TB.100 TB.101 TB.102 TB.103 TB.104 U1.9 U1.15 U2.9 U2.15 X5.1 X8.1 X11.1 X16.1 X21.1 | length 40.1
  Top Layer w0.254: v1(2.667,11.303) 3.445,12.081 D2.1 4.511,12.131 4.684,12.304 4.734,12.304 5.511,13.081 6.731,13.081 7.513,12.299 8.021,12.299 8.194,12.126 D1.1 ; D5.1 6.3,56.56 6.899,56.56 7.548,55.911 8.464,55.911 8.898,56.345 8.898,57.539 v1(9.398,58.039) 9.906,57.531 D6.1 ; D3.1 6.411,33.081 6.238,32.908 6.188,32.908 5.538,32.258 ; D8.1 7.513,36.465 7.191,36.787 7.191,36.874 6.854,37.211 5.257,37.211 4.734,36.688 4.684,36.688 4.511,36.515 D7.1 3.826,36.465 v1(2.159,34.798) 3.208,33.749 3.208,33.241 4.191,32.258 5.538,32.258 ; D4.1 10.033,33.097 9.86,32.924 9.81,32.924 9.144,32.258 5.538,32.258 ; TB.3@20.03,63.79 TB.3 ; J5.2 94.921,95.123 97.409,95.123 C2.2 ; C3.2 120.81,90.17 120.937,90.043 v1(121.031,90.043) ; C4.2 v1(121.031,81.28)
"I2C1 SCL": R1.2 TB.67 X9.1 | length 79.6
  Top Layer w0.254: R1.2 6.35,66.802 X9.1
  Bottom Layer w0.254: X9.1 10.414,65.278 12.065,63.627 12.065,54.864 19.685,47.244 23.114,47.244 24.384,45.974 TB.67
"I2C1 SDA": R2.2 TB.68 X10.1 | length 83
  Top Layer w0.254: R2.2 4.953,61.872 5.819,62.738 X10.1 ; X10.1@7.251,62.115 X10.1@7.493,62.357
  Bottom Layer w0.254: X10.1@8.497,62.115 X10.1 9.652,62.738 11.43,60.96 11.43,54.483 12.446,53.467 12.446,51.689 19.431,44.704 71.13,44.704 72.321,45.895 73.327,45.895 TB.68
NetC1_2: C1.2 C2.1 J5.1 J6.1 XF1.1 XF1.2 | length 38.1
  Top Layer w2: J6.1 85.979,96.901 87.757,98.679 90.115,98.679 J5.1 93.654,98.806 100.584,98.806 103.926,95.464 C1.2 102.502,95.377 C2.1 99.962,89.955 XF1.1 XF1.2
NetC3_1: C3.1 FB1.1 XF1.3 XF1.4 | length 11.7
  Top Layer w2: XF1.4 XF1.3 115.645,90.17 C3.1 116.961,88.165 FB1.1
NetU1_1: U1.1 X31.1 | length 8.7
  Top Layer w0.254: X31.1 98.171,80.264 U1.1
NetU1_2: U1.2 X25.1 | length 8.5
  Top Layer w0.254: X25.1 U1.2
NetU1_3: U1.3 X23.1 | length 8.7
  Top Layer w0.254: X23.1 90.551,74.676 U1.3
NetU1_4: U1.4 X33.1 | length 8.8
  Top Layer w0.254: X33.1 97.82,71.374 98.582,72.136 U1.4
NetU1_5: U1.5 X29.1 | length 9
  Top Layer w0.254: X29.1 97.536,68.453 U1.5
NetU1_6: U1.6 X27.1 | length 9
  Top Layer w0.254: X27.1 96.266,65.913 97.409,67.056 U1.6
NetU2_1: U2.1 X45.1 | length 10.3
  Top Layer w0.254: X45.1 U2.1
NetU2_2: U2.2 X39.1 | length 10.4
  Top Layer w0.254: X39.1 88.773,43.18 U2.2
NetU2_3: U2.3 X37.1 | length 10.6
  Top Layer w0.254: X37.1 97.82,39.878 98.582,40.64 U2.3
NetU2_4: U2.4 X35.1 | length 10.8
  Top Layer w0.254: X35.1 97.536,36.957 U2.4
NetU2_5: U2.5 X43.1 | length 10.9
  Top Layer w0.254: X43.1 96.012,34.036 97.533,35.557 98.676,35.557 U2.5
NetU2_6: U2.6 X41.1 | length 10.9
  Top Layer w0.254: X41.1 97.155,31.496 U2.6
PB11: D5.3 TB.33 X12.1 | length 41.8
  Top Layer w0.254: D5.3 5.268,54.592 5.441,54.419 5.491,54.419 6.189,53.721 9.525,53.721 9.906,53.34 9.906,49.911 ; X12.1 9.906,49.911 ; TB.33 21.336,26.924 21.336,31.242 20.389,32.189 18.992,32.189 18.542,32.639 18.542,40.132 9.906,48.768 9.906,49.911
PB12: D6.3 TB.36 X13.1 | length 43.7
  Top Layer w0.254: X13.1 9.779,47.498 9.779,46.101 10.287,45.593 ; D6.3 8.956,54.592 9.129,54.419 9.589,54.419 v1(10.795,53.213) ; v1(10.668,46.609) 10.622,46.563 10.622,45.928 10.287,45.593 ; TB.36 21.336,24.384 19.558,24.384 18.542,25.4 18.542,31.115 17.907,31.75 17.907,37.973 10.287,45.593
  Bottom Layer w0.254: v1(10.668,46.609) 10.668,52.992 10.795,53.119 v1(10.795,53.213)
PB13: D7.3 TB.35 X14.1 | length 38.2
  Top Layer w0.254: D7.3 v1(5.461,39.751) ; X14.1 12.319,42.418 ; v1(11.811,41.656) 12.319,42.164 12.319,42.418 ; TB.35 17.907,25.273 17.907,30.48 17.399,30.988 17.399,37.338 12.319,42.418
  Bottom Layer w0.254: v1(5.461,39.751) 9.906,39.751 v1(11.811,41.656)
PB14: D8.3 TB.38 X15.1 | length 34.7
  Top Layer w0.254: X15.1 10.604,41.593 ; D8.3 9.144,40.132 10.604,41.593 ; TB.38 21.336,21.844 19.431,21.844 16.891,24.384 16.891,35.306 10.604,41.593
PD12: D4.3 TB.44 X17.1 | length 28
  Top Layer w0.254: X17.1 10.668,27.559 ; D4.3 9.083,31.097 10.668,29.512 10.668,27.559 ; TB.44 22.606,13.208 21.482,14.332 21.482,16.11 20.994,16.598 19.967,16.598 14.425,22.14 14.425,25.199 12.065,27.559 10.668,27.559
PD13: D3.3 TB.43 X18.1 | length 28.3
  Top Layer w0.254: D3.3 5.461,31.081 6.157,30.385 6.157,29.911 v1(6.223,29.845) ; X18.1 8.497,24.396 9.364,24.396 9.652,24.108 ; v1(10.287,25.908) 9.652,25.273 9.652,24.108 ; TB.43 9.652,23.368 9.652,24.108
  Bottom Layer w0.254: v1(6.223,29.845) 8.636,29.845 10.287,28.194 v1(10.287,25.908)
PD14: D2.3 TB.46 X19.1 | length 30.4
  Top Layer w0.254: D2.3 5.461,15.273 5.588,15.4 v1(5.588,15.494) ; X19.1 12.393,17.96 13.409,17.96 ; v1(12.319,16.637) 13.409,17.727 13.409,17.96 ; TB.46 21.45,11.57 19.799,11.57 13.409,17.96
  Bottom Layer w0.254: v1(5.588,15.494) 5.654,15.428 6.035,15.428 6.223,15.24 10.922,15.24 v1(12.319,16.637)
PD15: D1.3 TB.45 X20.1 | length 19.6
  Top Layer w0.254: X20.1 10.414,17.399 10.414,16.51 ; D1.3 9.144,15.24 10.414,16.51 ; TB.45 16.51,10.414 10.414,16.51
"SPI1 MISO": TB.18 X4.1 | length 43.7
  Top Layer w0.254: X4.1 16.383,71.755 16.383,48.123 19.617,44.889 20.515,44.889 21.521,45.895 22.527,45.895 TB.18
"SPI1 MOSI": TB.17 X3.1 | length 41.9
  Top Layer w0.254: X3.1 17.272,73.406 17.272,48.768 TB.17
"SPI1 NSS": R3.2 TB.16 X1.1 | length 54.2
  Top Layer w0.254: R3.2 6.209,90.274 7.251,89.232 7.251,88.507 X1.1 ; R3.2@6.336,90.297 9.017,90.297 18.542,80.772 18.542,51.044 19.916,49.67 21.45,49.67 TB.16
"SPI1 SCK": TB.15 X2.1 | length 41.9
  Top Layer w0.254: X2.1 17.907,75.311 17.907,50.673 TB.15
"UART4 RX": TB.86 X7.1 | length 98
  Top Layer w0.254: X7.1 15.875,64.516 v1(15.875,46.99) ; v1(38.608,42.164) 51.562,42.164 69.342,24.384 72.136,24.384 TB.86
  Bottom Layer w0.254: v1(15.875,46.99) 15.875,43.942 17.653,42.164 v1(38.608,42.164)
"UART4 TX": TB.85 X6.1 | length 104.5
  Top Layer w0.254: X6.1 6.892,74.075 5.517,74.075 5.334,73.892 5.334,69.088 6.223,68.199 9.652,68.199 14.478,63.373 v1(14.478,47.117) ; v1(51.435,39.751) 68.072,23.114 TB.85
  Bottom Layer w0.254: v1(14.478,47.117) 14.478,42.799 17.526,39.751 v1(51.435,39.751)
VMOT: C4.1 FB1.2 U1.16 U2.16 | length 48.6
  Top Layer w2: U1.16 112.903,81.28 C4.1 117.475,81.788 FB1.2
  Bottom Layer w2: U2.16 111.379,57.594 105.537,63.436 105.537,75.311 109.982,79.756 U1.16
pads on no net: J1.MH1 J1.MH2 J2.MH1 J2.MH2 J3.MH1 J3.MH2 J4.MH1 J4.MH2 J5.MH1 J5.MH2 J6.MH1 J6.MH2 M8.1 M9.1 M10.1 M11.1 TB.1 TB.4 TB.5 TB.6 TB.7 TB.8 TB.10 TB.12 TB.13 TB.19 TB.20 TB.23 TB.25 TB.26 TB.27 TB.28 TB.29 TB.30 TB.31 TB.32 TB.34 TB.37 TB.39 TB.40 TB.41 TB.42 TB.47 TB.48 TB.51 TB.53 TB.54 TB.55 TB.56 TB.57 TB.58 TB.59 TB.60 TB.63 TB.64 TB.65 TB.66 TB.69 TB.70 TB.74 TB.75 TB.77 TB.78 TB.79 TB.80 TB.81 TB.82 TB.83 TB.84 TB.88 TB.89 TB.91 TB.92 TB.95 TB.96 TB.97 TB.98

## Polygon pours and split planes (outlines as drawn)
GND on Bottom Layer "GND_L04_P001" (solid, remove dead copper, pour order 1): 0,0 122.4,0 122.4,101.6 0,101.6
GND on Top Layer "GND_L01_P000" (solid, remove dead copper, pour order 0): 0,0 122.4,0 122.4,101.6 0,101.6
5V on Int 2 (PWR) (split plane): 87.106,59.039 87.148,59.007 87.197,58.987 87.249,58.98 99.187,58.98 99.239,58.987 99.288,59.007 99.33,59.039 103.584,63.294 104.41,64.119 105.748,65.457 113.717,65.457 113.717,27.643 110.66,24.586 70.315,24.586 69.163,25.738 69.163,66.718 70.569,68.124 78.021,68.124
3.3V on Int 2 (PWR) (split plane): 121.89,0.51 0.51,0.51 0.51,101.09 121.89,101.09
GND on Int1 (GND) (split plane): 121.89,0.51 0.51,0.51 0.51,101.09 121.89,101.09

## Other copper
Int 2 (PWR) (plane layer: these items are gaps in the copper):
  lines w0.4: 68.961,25.654 70.231,24.384 110.744,24.384 113.919,27.559 113.919,65.659 110.426,65.659 105.664,65.659 104.267,64.262 103.441,63.436 99.187,59.182 87.249,59.182 78.105,68.326 70.485,68.326 68.961,66.802 68.961,25.654

## Silkscreen, mask and mechanical layers (free items; w line width, h text height)
Top Overlay:
  text "SPI NSS" at 1.27,87.376 h0.75
  text "SPI CLK" at 1.27,84.836 h0.75
  text "SPI MOS" at 1.143,82.296 h0.75
  text "SPI MIS" at 1.143,79.756 h0.75
  text "GND" at 3.429,77.089 h0.75
  text "UART TX" at 1.016,74.549 h0.75
  text "UART RX" at 1.016,71.882 h0.75
  text "GND" at 3.937,69.469 h0.75
  text "I2C SCL" at 1.143,64.262 h0.75
  text "I2C SDA" at 1.143,63.119 h0.75 r358.9
  text "GND" at 4.064,59.563 h0.75
  text "PB11" at 2.413,51.308 h0.75
  text "PB12" at 2.286,48.641 h0.75
  text "PB13" at 2.286,46.101 h0.75
  text "PB14" at 2.413,43.561 h0.75
  text "GND" at 2.921,41.275 h0.75
  text "PD12" at 2.286,26.797 h0.75
  text "PD13" at 2.286,24.257 h0.75
  text "PD14" at 2.286,21.717 h0.75
  text "PD15" at 2.286,19.177 h0.75
  text "GND" at 2.921,16.891 h0.75
  text "Blood Flow Phantom v1.0 / Author: Ilia Nazemtsev" at 81.788,10.033 h1.75